# Altium PCB PCB1_IGNIS_v2_2.PcbDoc
Units mil, origin at the board's own origin, x right, y up, seen from the top; angles counter-clockwise.
Board outline 3740.16 x 1574.8 mil, 4 copper layers (Top Layer, GND Pour, Power Pour, Bottom Layer), stack 17.367 mil thick; 95 components, 62 nets, 365 pads, 110 vias.
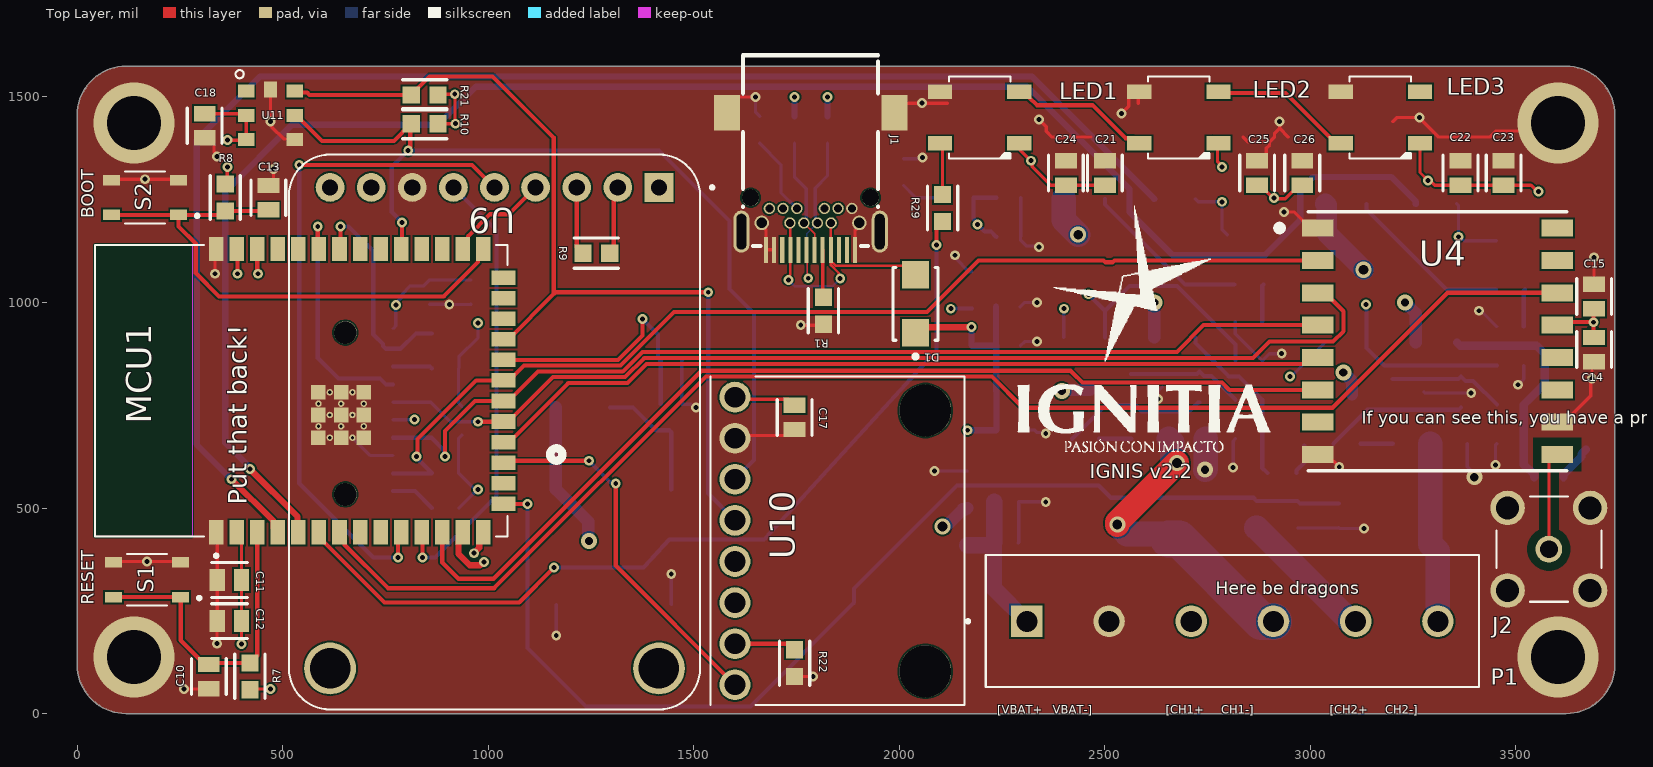
[diagram p0: Top Layer view]
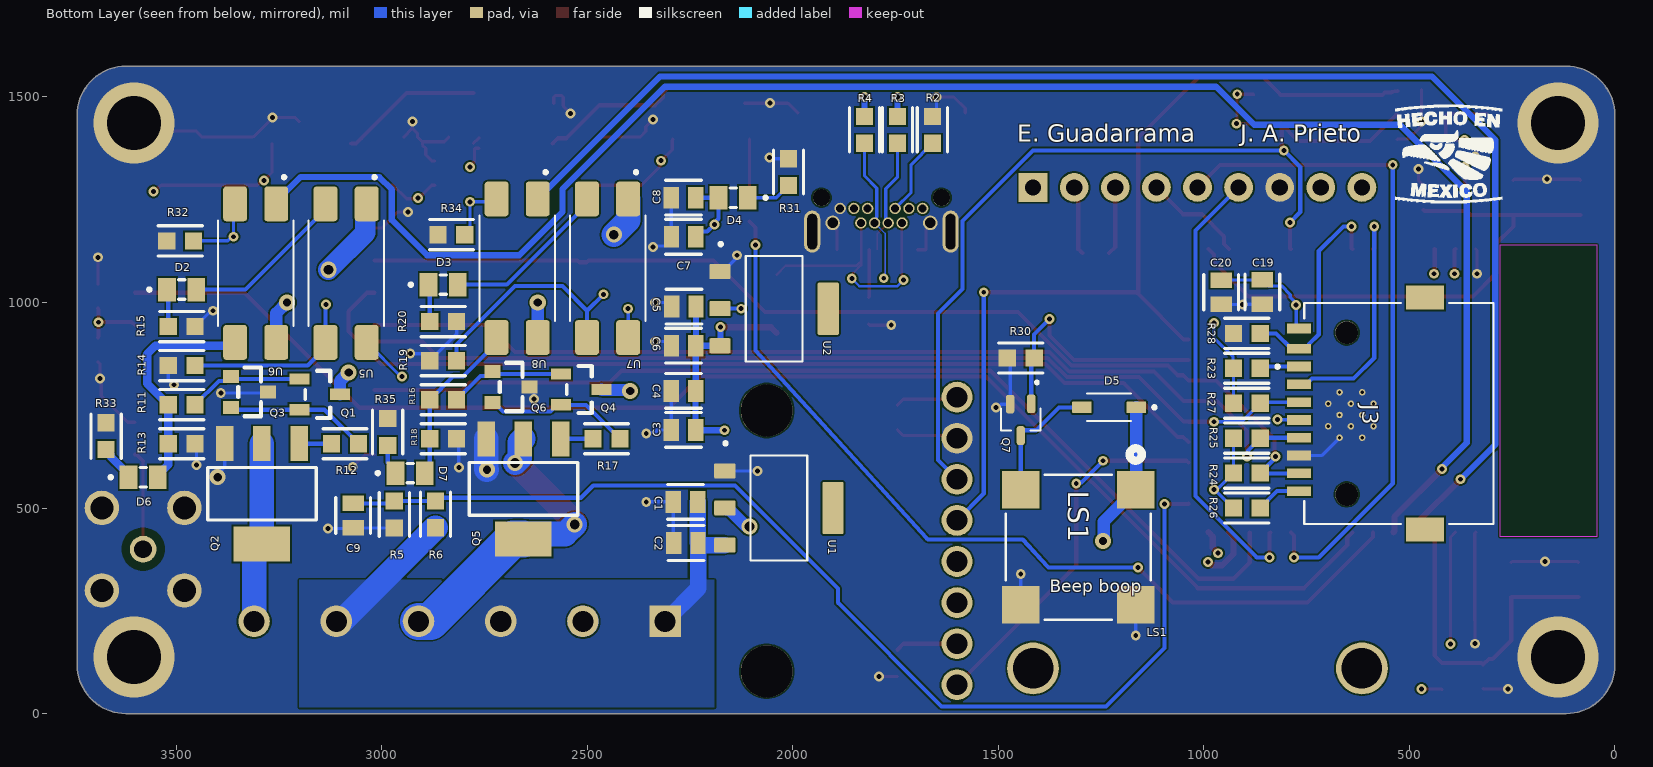
[diagram p1: Bottom Layer view, seen from below]
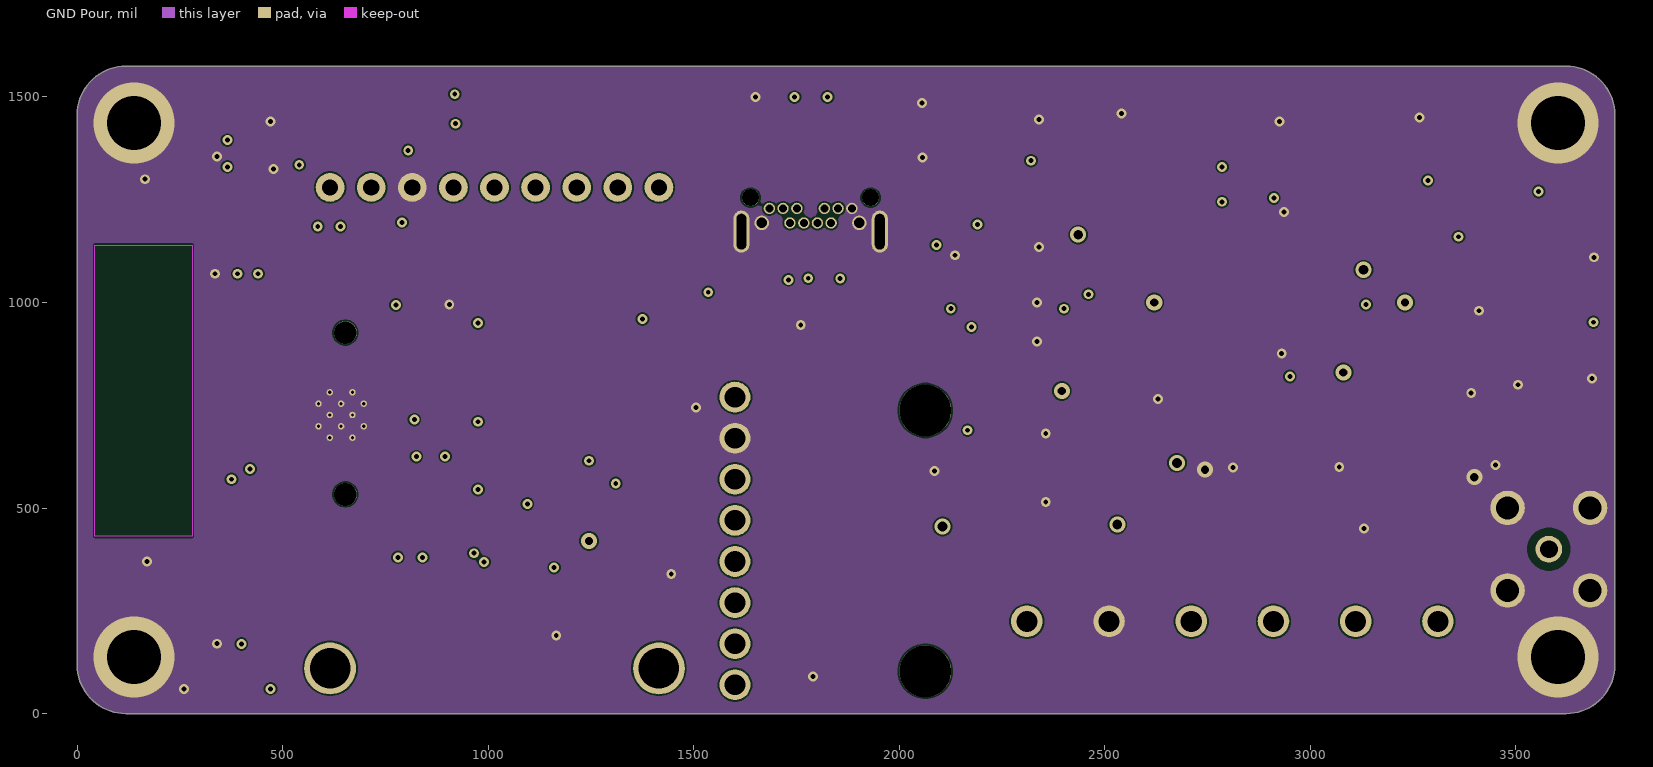
[diagram p2: GND Pour]
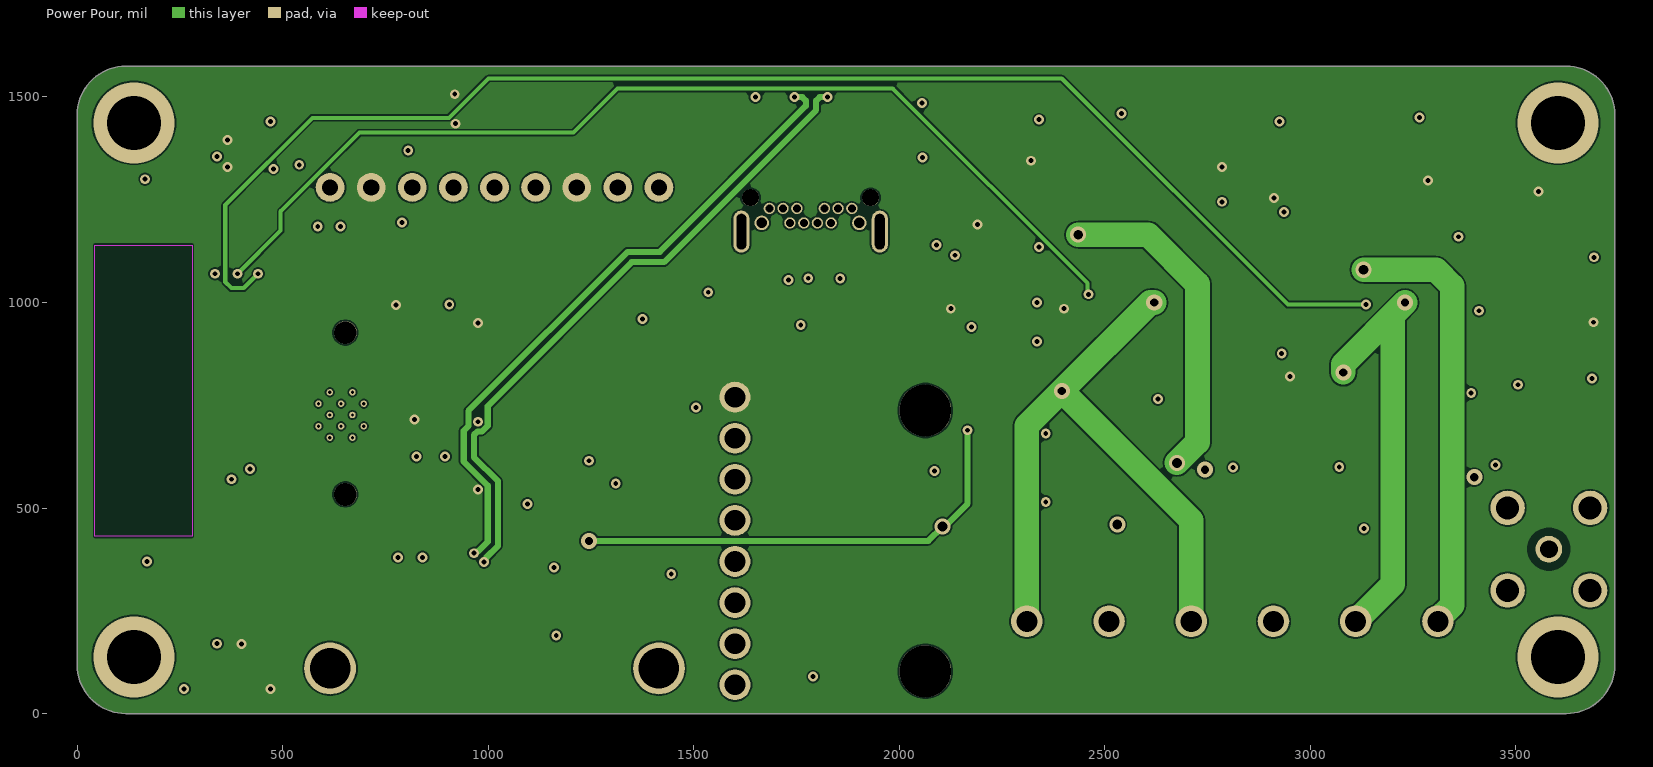
[diagram p3: Power Pour]

## Layer stack, top to bottom
Top Solder: solder mask 0.4, Solder Resist, Dk 3.5
Top Layer: signal copper 1.4
Dielectric 2: prepreg 3.937, PP-006, Dk 4.05
GND Pour: signal copper 1.378
Dielectric 1: dielectric 3.937, FR-4, Dk 4.8
Power Pour: signal copper 1.378
Dielectric 3: prepreg 3.937, PP-006, Dk 4.05
Bottom Layer: signal copper 1.4
Bottom Solder: solder mask 0.4, Solder Resist, Dk 3.5

## Board outline
0,118 0,1456.8 cw(c118,1456.8) 118,1574.8 3622.16,1574.8 cw(c3622.16,1456.8) 3740.16,1456.8 3740.16,118 cw(c3622.16,118) 3622.16,0 118,0 cw(c118,118)

## Design rules (kind name [scope] priority, off if disabled: settings)
Clearance RF_Clearance [InNet('NetJ2_1')] p1: gap=20 ignorepadtopadclearanceinfootprint=FALSE
Clearance USBC_3 [InComponent('J1') vs InComponent('J1')] p2: gap=3.94 ignorepadtopadclearanceinfootprint=FALSE
Clearance MCU_2 [InComponent('MCU1') vs InComponent('MCU1')] p3: gap=1.97 ignorepadtopadclearanceinfootprint=FALSE
Clearance [All] p4: gap=4 ignorepadtopadclearanceinfootprint=FALSE
ComponentClearance GPS [InComponent('U9') vs InComponent('MCU1') Or InComponent('R9')] p1: gap=0 collisioncheckmode=3 verticalgap=100000 showdistances=FALSE donotcheckwithout3dbody=TRUE
ComponentClearance IMU [InComponent('U10') vs InComponent('U9')] p2: gap=0 collisioncheckmode=3 verticalgap=100000 showdistances=FALSE donotcheckwithout3dbody=TRUE
ComponentClearance Buzzer [InComponent('LS1') vs InComponent('R30') Or InComponent('R31') Or InComponent('Q7')  Or InComponent('P1')] p3: gap=0 collisioncheckmode=3 verticalgap=100000 showdistances=FALSE donotcheckwithout3dbody=TRUE
ComponentClearance SD [InComponent('J3') Or InComponent('C19') Or InComponent('C20') Or InComponent('R23') Or InComponent('R24') Or InComponent('R25') Or InComponent('R26') Or InComponent('R27') Or InComponent('R28') vs InComponent('U9') Or InComponent('MCU1')] p4: gap=0 collisioncheckmode=3 verticalgap=100000 showdistances=FALSE donotcheckwithout3dbody=TRUE
ComponentClearance [All] p5: gap=10 collisioncheckmode=3 verticalgap=10 showdistances=FALSE
DiffPairsRouting [All] p1: maxlimit=10 minlimit=10 mostfreqgap=10 toplayer_minwidth=15 toplayer_maxwidth=15 toplayer_prefwidth=15 midlayer1_minwidth=15 midlayer1_maxwidth=15 midlayer1_prefwidth=15 midlayer2_minwidth=15 midlayer2_maxwidth=15 midlayer2_prefwidth=15 bottomlayer_minwidth=15 bottomlayer_maxwidth=15 bottomlayer_prefwidth=15 maxuncoupledlength=500
HoleSize IMU_Hole [All] p1: absolutevalues=TRUE maxlimit=157.48 minlimit=1 maxpercent=80.000 minpercent=20.000
HoleSize "Mounting Holes" [IsVia] p2: absolutevalues=TRUE maxlimit=137.8 minlimit=1 maxpercent=80.000 minpercent=20.000
HoleSize [All] p3: absolutevalues=TRUE maxlimit=100 minlimit=1 maxpercent=80.000 minpercent=20.000
MinimumSolderMaskSliver USBC_1 [InComponent('J1') vs InComponent('J1')] p1: minsoldermaskwidth=1.18
MinimumSolderMaskSliver [All] p2: minsoldermaskwidth=10
NetAntennae [NOT (IsVia And InNet('GND'))] p1: netantennaetolerance=0
PolygonConnect VCC3V3_DirectConnect [InNet('VCC_3V3')] p1: connectstyle=Direct reliefconductorwidth=10 reliefentries=4 polygonreliefangle="90 Angle" airgapwidth=10
PolygonConnect GND_DirectConnect [InNet('GND')] p2: connectstyle=Direct reliefconductorwidth=10 reliefentries=4 polygonreliefangle="90 Angle" airgapwidth=10
PolygonConnect MCU1_ThermalPad_DirectConnect [InNet('GND') And InComponent('MCU1')] p3: connectstyle=Direct reliefconductorwidth=10 reliefentries=4 polygonreliefangle="90 Angle" airgapwidth=10
PolygonConnect VBAT_DirectConnect [InNet('VBAT')] p4: connectstyle=Direct reliefconductorwidth=10 reliefentries=4 polygonreliefangle="90 Angle" airgapwidth=10
PolygonConnect [All] p5: connectstyle=Relief reliefconductorwidth=10 reliefentries=4 polygonreliefangle="90 Angle" airgapwidth=10
RoutingVias [All] p1: holewidth=28 width=50 viastyle="Through Hole" minholewidth=12 minwidth=24 maxholewidth=12 maxwidth=24
SilkToSolderMaskClearance MCU_GPS [InComponent('MCU1') vs InComponent('U9')] p1: minsilkscreentomaskgap=1.97 clearancetoexposedcopper=TRUE
SilkToSolderMaskClearance Diodes [InComponent('D1') Or InComponent('D2') Or InComponent('D3') Or InComponent('D4') Or InComponent('D5') Or InComponent('D6') Or InComponent('D7')] p2: minsilkscreentomaskgap=1.97 clearancetoexposedcopper=TRUE
SilkToSolderMaskClearance USBC_2 [InComponent('J1') vs InComponent('J1')] p3: minsilkscreentomaskgap=1.18 clearancetoexposedcopper=TRUE
SilkToSolderMaskClearance [IsPad] p4: minsilkscreentomaskgap=3.94 clearancetoexposedcopper=TRUE
SolderMaskExpansion [All] p1: expansion=0 istentingtop=FALSE
SupplyNets "Schematic Supply Nets_3" [InNet('VCC_3V3')] p1: voltage=0.000
SupplyNets "Schematic Supply Nets_2" [InNet('GND')] p2: voltage=0.000
SupplyNets "Schematic Supply Nets_1" [InNet('VBAT')] p3: voltage=0.000
SupplyNets "Schematic Supply Nets" [InNet('VCC_5V')] p4: voltage=0.000
Width [All] p1: maxlimit=98 minlimit=4 preferedwidth=10 midlayer1_minwidth=10 midlayer2_minwidth=10 minimp=50.000000 maximp=50.000000 favimp=50.000000
24 further rules are at their usual default settings.

## Classes and differential pairs
component class U_Storage: C19 C20 J3 R23 R24 R25 R26 R27 R28
component class U_Sensors: C17 C18 R10 R21 R22 U10 U11
component class U_RF_LoRa_&_GPS: C14 C15 J2 R9 U4 U9
component class U_Pyros: D2 D3 D6 D7 P1 Q1 Q2 Q3 Q4 Q5 Q6 R11 R12 R13 R14 R15 R16 R17 R18 R19 R20 R32 R33 R34 R35 U5 U6 U7 U8
component class U_Power: C1 C2 C3 C4 C5 C6 C7 C8 C9 D1 D4 J1 R1 R2 R3 R4 R5 R6 R31 U1 U2
component class U_Indicators: C21 C22 C23 C24 C25 C26 D5 LED1 LED2 LED3 LS1 Q7 R29 R30
component class Main: C10 C11 C12 C13 MCU1 R7 R8 S1 S2
differential pair USB2: +USB2_P -USB2_N

## Components (designator, comment, footprint, x,y, rotation, side; value= is the part's Value field where it differs from the comment)
C1 "10uF" FP-C0805C-DN-MFG 2260.47,515 r0 bottom value="0.10 μF"
C2 "100nF" FP-C0805C-DN-MFG 2259.53,415 r0 bottom value="0.10 μF"
C3 "10uF" FP-C0805C-DN-MFG 2265.47,690 r0 bottom value="0.10 μF"
C4 "100nF" FP-C0805C-DN-MFG 2265.47,785 r0 bottom value="0.10 μF"
C5 "10uF" FP-C0805C-DN-MFG 2264.53,990 r0 bottom value="0.10 μF"
C6 "100nF" FP-C0805C-DN-MFG 2265,895 r0 bottom value="0.10 μF"
C7 "10uF" FP-C0805C-DN-MFG 2265,1160 r0 bottom value="0.10 μF"
C8 "100nF" FP-C0805C-DN-MFG 2265.47,1255 r0 bottom value="0.10 μF"
C9 "100nF" FP-C0805C-DN-MFG 3068.85,482 r270 bottom value="0.10 μF"
C10 "1uF" FP-C0805C-DN-MFG 320,90 r270 top value="0.10 μF"
C11 "100nF" FP-C0805C-DN-MFG 370,325 r180 top value="0.10 μF"
C12 "22uF" FP-C0805C-DN-MFG 370,225 r180 top value="0.10 μF"
C13 "100nF" FP-C0805C-DN-MFG 465,1255 r90 top value="0.10 μF"
C14 "100nF" FP-C0805C-DN-MFG 3690,885.47 r270 top value="0.10 μF"
C15 "10uF" FP-C0805C-DN-MFG 3690,1014.53 r90 top value="0.10 μF"
C17 "100nF" FP-C0805C-DN-MFG 1745,720.47 r270 top value="0.10 μF"
C18 "100nF" FP-C0805C-DN-MFG 310,1430 r270 top value="0.10 μF"
C19 "22uF" FP-C0805C-DN-MFG 857.35,1025.47 r270 bottom value="0.10 μF"
C20 "100nF" FP-C0805C-DN-MFG 957.35,1025 r270 bottom value="0.10 μF"
C21 "100nF" FP-C0805C-DN-MFG 2500,1315 r90 top value="0.10 μF"
C22 "100nF" FP-C0805C-DN-MFG 3365,1315 r90 top value="0.10 μF"
C23 "100nF" FP-C0805C-DN-MFG 3470,1315 r90 top value="0.10 μF"
C24 "10uF" FP-C0805C-DN-MFG 2405,1315 r90 top value="0.10 μF"
C25 "10uF" FP-C0805C-DN-MFG 2870,1315 r90 top value="0.10 μF"
C26 "10uF" FP-C0805C-DN-MFG 2980,1315 r90 top value="0.10 μF"
D1 "SS24SHE3_B/H" FP-95400-MFG 2039.18,996.73 r90 top
D2 "SML-LXT0805IW-TR" LEDC2012X120N 3486.15,1031.5 r180 bottom
D3 "SML-LXT0805IW-TR" LEDC2012X120N 2850,1043.5 r180 bottom
D4 "SML-LXT0805IW-TR" LEDC2012X120N 2144.57,1255 r0 bottom
D5 "1N4148W-7" SOD3715X135N 1230,745 r0 bottom
D6 "SML-LXT0805IW-TR" LEDC2012X120N 3580,575 r180 bottom
D7 "SML-LXT0805IW-TR" LEDC2012X120N 2930.43,585 r180 bottom
J1 "2345986-1" TE_2345986-1 1779.18,1411.73 r180 top
J2 "BWSMA-KE-Z001" BAT_WIRELESS_BWSMA-KE-Z001 3580,400 r90 top
J3 "MSD-11-A" CUI_MSD-11-A 525,730 r90 bottom
LED1 "WS2812B" *LED3535 2195,1450 r180 top
LED2 "WS2812B" *LED3535 2680,1450 r180 top
LED3 "WS2812B" *LED3535 3170,1450 r180 top
LS1 "MLT-8530" MLT-8530_JHE 1305,405 r270 bottom
MCU1 "ESP32-S3-WROOM-1-N16R8" XCVR_ESP32-S3-WROOM-1-N16R2 545,785.47 r90 top
P1 "1729160" PHOENIX_1729160 2210,65 r0 top
Q1 "S8050_NPN" PCBComponent_1#1 3156.54,773.98 r0 bottom
Q2 "NCE6005AR_Mosfet_N" PCBComponent_1#2 3295,530 r90 bottom
Q3 "SS8550_PNP" PCBComponent_1#3 3311.15,781.5 r0 bottom
Q4 "S8050_NPN" PCBComponent_1#1 2520.39,785.98 r0 bottom
Q5 "NCE6005AR_Mosfet_N" PCBComponent_1#2 2658.85,542 r90 bottom
Q6 "SS8550_PNP" PCBComponent_1#3 2675,793.5 r0 bottom
Q7 "NTS4001NT1G" SOT65P220X100-3N 1445,715 r270 bottom
R1 "5.1k" FP-MCT0603-IPC_A 1815,980 r270 top
R2 "5.1k" FP-MCT0603-IPC_A 1660,1420 r90 bottom
R3 "22" FP-MCT0603-IPC_A 1745,1420 r270 bottom
R4 "22" FP-MCT0603-IPC_A 1825,1420 r270 bottom
R5 "47k" FP-MCT0603-IPC_A 2968.85,484.35 r270 bottom
R6 "100k" FP-MCT0603-IPC_A 2868.85,484.66 r270 bottom
R7 "10k" FP-MCT0603-IPC_A 420,90.47 r90 top
R8 "10k" FP-MCT0603-IPC_A 360,1255.47 r270 top
R9 "4k7" FP-MCT0603-IPC_A 1262.65,1120 r0 top
R10 "4k7" FP-MCT0603-IPC_A 845,1435 r180 top
R11 "1k" FP-MCT0603-IPC_A 3486.15,751.5 r180 bottom
R12 "100" FP-MCT0603-IPC_A 3088.8,656.5 r0 bottom
R13 "1k" FP-MCT0603-IPC_A 3486.15,656.5 r0 bottom
R14 "1k" FP-MCT0603-IPC_A 3486.15,846.5 r0 bottom
R15 "600" FP-MCT0603-IPC_A 3486.15,941.5 r180 bottom
R16 "1k" FP-MCT0603-IPC_A 2850,763.5 r180 bottom
R17 "100" FP-MCT0603-IPC_A 2452.65,668.5 r0 bottom
R18 "1k" FP-MCT0603-IPC_A 2850,668.5 r0 bottom
R19 "1k" FP-MCT0603-IPC_A 2850,858.5 r0 bottom
R20 "600" FP-MCT0603-IPC_A 2850,953.5 r180 bottom
R21 "4k7" FP-MCT0603-IPC_A 845,1505 r180 top
R22 "4k7" FP-MCT0603-IPC_A 1745,122.65 r90 top
R23 "10k" FP-MCT0603-IPC_A 895,840 r180 bottom
R24 "10k" FP-MCT0603-IPC_A 895,585 r180 bottom
R25 "10k" FP-MCT0603-IPC_A 895,670 r180 bottom
R26 "10k" FP-MCT0603-IPC_A 895,500 r180 bottom
R27 "10k" FP-MCT0603-IPC_A 895,755 r180 bottom
R28 "10k" FP-MCT0603-IPC_A 895,925 r180 bottom
R29 "33" FP-MCT0603-IPC_A 2105,1230 r90 top
R30 "10k" FP-MCT0603-IPC_A 1445,865 r0 bottom
R31 "1k" FP-MCT0603-IPC_A 2010,1317.35 r90 bottom
R32 "100" FP-MCT0603-IPC_A 3490,1150 r0 bottom
R33 "1k" FP-MCT0603-IPC_A 3670,675 r90 bottom
R34 "100" FP-MCT0603-IPC_A 2830,1165 r0 bottom
R35 "1k" FP-MCT0603-IPC_A 2985,685 r90 bottom
S1 "Reset" SW_SKRPABE010 170,325.47 r180 top
S2 "Boot" SW_SKRPABE010 165,1255.47 r180 top
U1 "AMS1117-5V" SOT229P700X180-4N 2033.31,500.16 r270 bottom
U2 "AMS1117-3V3" SOT229P700X180-4N 2045,985 r270 bottom
U4 "RFM95W-868S2" XCVR_RFM95W-868S2 3308.66,905.63 r0 top
U5 "PC817X2NIP1B" SOIC254P960X420-4N 3086.15,1071.5 r270 bottom
U6 "PC817X2NIP1B" SOIC254P960X420-4N 3306.15,1071.5 r270 bottom
U7 "PC817X2NIP1B" SOIC254P960X420-4N 2450,1083.5 r270 bottom
U8 "PC817X2NIP1B" SOIC254P960X420-4N 2670,1083.5 r270 bottom
U9 "746" XCVR_746 1015,685 r180 top
U10 "GY-521" MODULE_GY-521 1849.21,420 r0 top
U11 "BMP180" LGA7-1.5-3.8X3.6MM 470,1455.47 r90 top

## Footprints (in the part's own frame and the unit in brackets; to place one, negate y for a bottom-side part, rotate by r counter-clockwise, add the part's x,y. Pads: shape width x height; smd on the part's side, far side on the other; paste and mask are expansions set on the pad)
*LED3535 [mm]
  rect 1.5x0.9 smd: 1(-2.45,1.6) 2(-2.45,-1.6) 3(2.45,-1.6) 4(2.45,1.6)
  silkscreen extent -1.91,-2.53 1.9,2.54, body extent -2.7,-2.5 2.7,2.5, height 1.49
BAT_WIRELESS_BWSMA-KE-Z001 [mm]
  round 1.65 hole 1.1: 1(0,0)
  round 2.13 hole 1.42: 2_1(-2.55,2.55) 2_2(2.55,2.55) 2_3(2.55,-2.55) 2_4(-2.55,-2.55)
  silkscreen extent -3.25,-3.25 3.25,3.25, body extent -3.23,-11.73 3.23,3.23, height 9.75
CUI_MSD-11-A [mm]
  rect 0.6x1.5 smd: CD(5.25,6.18) P1(2.9,6.18) P2(1.8,6.18) P3(0.7,6.18) P4(-0.4,6.18) P5(-1.5,6.18) P6(-2.6,6.18) P7(-3.7,6.18) P8(-4.8,6.18) WP(4,6.18)
  rect 1.5x2.34 smd: G1(-7.17,-1.62) G2(7.17,-1.62)
  round 1.4 hole 1.4 unplated: ""(-5,3.23) ""(5,3.23)
  silkscreen extent -6.84,-5.85 6.84,7.6, body extent -7.39,-5.87 7.39,6.73, height 1.82
FP-95400-MFG [mm]
  rect 1.7x1.68 smd paste+0 mask+0: 1(-1.79,0) 2(1.79,0)
  silkscreen extent -3.37,-1.4 2.25,1.4, body extent -2.74,-1.5 2.74,1.5, height 0.25
FP-C0805C-DN-MFG [mm]
  rect 0.95x1.35 smd paste+0 mask+0: 1(-0.75,0) 2(0.75,0)
  silkscreen extent -1.1,-1.07 1.1,1.07, body extent -1,-0.63 1,0.63, height 0.88
FP-MCT0603-IPC_A [mil]
  rect 41.88x41.82 smd paste+0 mask+0: 1(-32.65,0) 2(32.65,0)
  silkscreen extent -54,-37 54,37, body extent -31,-17 31,17, height 22
LEDC2012X120N [mm]
  rect 1.1x1.45 smd: A(0.9,0) C(-0.9,0)
  silkscreen extent -2.1,-0.6 0.2,0.6, body extent -1,-0.65 1,0.65, height 0.9
LGA7-1.5-3.8X3.6MM [mm]
  rect 0.8x1 smd: 1(1.5,1.5) 2(0,1.5) 3(-1.5,1.5) 4(-1.5,-1.5) 5(0,-1.5) 6(1.5,-1.5)
  rect 1x0.8 smd: 7(1.6,0)
  silkscreen extent 2.29,1.65 2.79,2.16, body extent -1.9,-1.8 1.9,1.8, height 1
MLT-8530_JHE [mil]
  rect 91x91 smd paste+0 mask+0: 1(-139.76,139.76) 2(-139.76,-139.76) 3(139.76,139.76) 4(139.76,-139.76)
  silkscreen extent -240,-177 177,177
MODULE_GY-521 [mm]
  round 1.905 hole 1.27 mask+0.102: AD0(-6.33,-6.35) GND(-6.33,6.35) INT(-6.33,-8.89) SCL(-6.33,3.81) SDA(-6.33,1.27) VCC(-6.33,8.89) XCL(-6.33,-3.81) XDA(-6.33,-1.27)
  round 3.2 hole 3.2 unplated mask+0: ""(5.43,-8.06) ""(5.43,8.06)
  silkscreen extent -7.85,-10.15 7.85,10.15, body extent -7.85,-10.15 7.85,10.15, height 11.6
PCBComponent_1#1 [mm]
  rect 1.25x0.7 smd paste+0 mask+0.102: 1(1.092,-1.014) 2(1.092,0.886) 3(-1.407,-0.064)
  silkscreen extent -0.81,-1.52 0.74,1.4
PCBComponent_1#2 [mm]
  rect 2.159x1.092 smd paste+0 mask+0.102: 1(3.213,-2.409) 2(3.213,-0.098) 3(3.213,2.188)
  rect 2.159x3.505 smd paste+0 mask+0.102: 4(-2.984,-0.098)
  silkscreen extent -1.51,-3.46 1.74,3.24
PCBComponent_1#3 [mm]
  rect 1x0.8 smd paste+0 mask+0.051: 1(1.403,-0.974) 2(1.403,0.926) 3(-0.897,-0.024)
  silkscreen extent -0.45,-1.52 0.95,1.48
PHOENIX_1729160 [mm]
  rect 1.95x1.95 / inner round 1.95 / far side rect 1.95x1.95 hole 1.3: 1(2.54,4.05)
  round 1.95 hole 1.3: 2(7.62,4.05) 3(12.7,4.05) 4(17.78,4.05) 5(22.86,4.05) 6(27.94,4.05)
  silkscreen extent -1.2,0 30.48,8.15, body extent -0.54,-0.02 30.51,8.13, height 9.97
SOD3715X135N [mm]
  rrect18% 1.21x0.73 smd paste+0 mask+0.102: A(1.68,0) C(-1.68,0)
  silkscreen extent -2.9,-0.85 1.35,0.85, body extent -1.91,-0.8 1.9,0.8, height 1.1
SOIC254P960X420-4N [mm]
  rrect25% 2.15x1.48 smd: 1(-4.28,1.27) 2(-4.28,-1.27) 3(4.28,-1.27) 4(4.28,1.27)
  silkscreen extent -6.03,-2.33 3.25,2.33, body extent -4.87,-2.29 4.87,2.29, height 4
SOT65P220X100-3N [mm]
  rrect50% 1.15x0.5 smd: 1(-0.98,0.65) 2(-0.96,-0.65) 3(0.98,0)
  silkscreen extent -2.4,-1.21 0.68,1.21
SOT229P700X180-4N [mm]
  rrect15% 0.93x1.31 smd: 1(-2.29,-3.345) 2(0,-3.345) 3(2.29,-3.345)
  rrect15% 3.24x1.31 smd: 4(0,3.345)
  silkscreen extent -4.09,-3.4 3.25,1.75, body extent -3.25,-3.5 3.25,3.5, height 1.8
SW_SKRPABE010 [mm]
  rect 1.05x0.65 smd: 1(-2.075,1.075) 2(2.075,1.075) 3(-2.075,-1.075) 4(2.075,-1.075)
  silkscreen extent -3.32,-1.6 1.23,1.6, body extent -2.3,-1.6 2.3,1.6, height 2.5
TE_2345986-1 [mm]
  rect 0.25x1.6 smd paste-100 mask+0.051: A1(-2.87,7.201) A2(-2.37,7.201) A3(-1.87,7.201) A4(-1.37,7.201) A5(-0.87,7.201) A6(-0.37,7.201) A7(0.13,7.201) A8(0.63,7.201) A9(1.129,7.201) A10(1.629,7.201) A11(2.129,7.201) A12(2.629,7.201)
  round 0.9 hole 0.65 paste-2539.97 mask+0.051: B1(2.899,5.541) B12(-3.131,5.541)
  round 0.7 hole 0.5 paste-2539.97 mask+0.051: B2(2.429,4.641) B3(1.579,4.641) B4(1.159,5.541) B5(0.729,4.641) B6(0.299,5.541) B7(-0.541,5.541) B8(-0.971,4.641) B9(-1.391,5.541) B10(-1.821,4.641) B11(-2.671,4.641)
  oval 1x2.6 hole 0.6 slot 2.2 at 90 deg paste-2539.97 mask+0.051: SH1(4.154,6.081) SH2(-4.396,6.081)
  rect 1.6x2.2 smd paste-100 mask+0.051: SH3(5.054,-1.269) SH4(-5.296,-1.269)
  round 1.05 hole 1.05 unplated paste-2539.97: ""(-3.831,3.981) ""(3.589,3.981)
  silkscreen extent -4.29,-4.82 4.05,6.97, body extent -4.75,-5.04 4.49,7.75, height 3.34
XCVR_746 [mil]
  rect 70x70 / inner round 70 / far side rect 70x70 hole 39.37 mask+4.02: 1(-400,-595)
  round 70 hole 39.37 mask+4.02: 2(-300,-595) 3(-200,-595) 4(-100,-595) 5(0,-595) 6(100,-595) 7(200,-595) 8(300,-595) 9(400,-595)
  round 125.98 hole 98.43 mask+4.02: SH1(-400,575) SH2(400,575)
  silkscreen extent -533,-675 500,675, body extent -500,-670 500,670, height 591
XCVR_ESP32-S3-WROOM-1-N16R2 [mm]
  rect 1.5x0.9 smd: 2(-8.75,3.99) 3(-8.75,2.72) 4(-8.75,1.45) 5(-8.75,0.18) 6(-8.75,-1.09) 7(-8.75,-2.36) 8(-8.75,-3.63) 9(-8.75,-4.9) 10(-8.75,-6.17) 11(-8.75,-7.44) 12(-8.75,-8.71) 13(-8.75,-9.98) 14(-8.75,-11.25) 27(8.75,-11.25) 28(8.75,-9.98) 29(8.75,-8.71) 30(8.75,-7.44) 31(8.75,-6.17) 32(8.75,-4.9) 33(8.75,-3.63) 34(8.75,-2.36) 35(8.75,-1.09) 36(8.75,0.18) 37(8.75,1.45) 38(8.75,2.72) 39(8.75,3.99) GND(-8.75,5.26) GND(8.75,5.26)
  rect 0.9x1.5 smd: 15(-6.985,-12.5) 16(-5.715,-12.5) 17(-4.445,-12.5) 18(-3.175,-12.5) 19(-1.905,-12.5) 20(-0.635,-12.5) 21(0.635,-12.5) 22(1.905,-12.5) 23(3.175,-12.5) 24(4.445,-12.5) 25(5.715,-12.5) 26(6.985,-12.5)
  round 0.4 hole 0.2 mask+0: 41_10(-1.5,-1.76) 41_11(-2.9,-1.76) 41_12(-0.1,-1.76) 41_13(-2.9,-3.16) 41_14(-1.5,-3.16) 41_15(-0.1,-3.16) 41_16(-2.2,-1.06) 41_17(-0.8,-1.06) 41_18(-2.2,-2.46) 41_19(-0.8,-2.46) 41_20(-2.2,-3.86) 41_21(-0.8,-3.86)
  rect 0.9x0.9 smd: GND(-2.9,-2.46) GND(-2.9,-1.06) GND(-2.9,-3.86) GND(-1.5,-1.06) GND(-1.5,-3.86) GND(-1.5,-2.46) GND(-0.1,-1.06) GND(-0.1,-2.46) GND(-0.1,-3.86)
  Keep-Out Layer region: 9,6.75 -9,6.75 -9,12.75 9,12.75
  Keep-Out Layer region: 9,6.75 -9,6.75 -9,12.75 9,12.75
  silkscreen extent -10.3,-12.75 9,12.75, body extent -9,-12.75 9,12.75, height 3.25
XCVR_RFM95W-868S2 [mm]
  rect 1.95x1.05 smd: 1(-7.4,7) 2(-7.4,5) 3(-7.4,3) 4(-7.4,1) 5(-7.4,-1) 6(-7.4,-3) 7(-7.4,-5) 8(-7.4,-7) 9(7.4,-7) 10(7.4,-5) 11(7.4,-3) 12(7.4,-1) 13(7.4,1) 14(7.4,3) 15(7.4,5) 16(7.4,7)
  silkscreen extent -10.04,-8 8,8, body extent -8,-8 8,8, height 1.8

## Part data
C1 C2 C3 C4 C5 C6 C7 C8 C9 C10 C11 C12 C13 C14 C15 C17 C18 C19 C20 C21 C22 C23 C24 C25 C26: library part CMP-2007-00279-2, "CAP CER 0.1UF 50V X7R 0805", Capacitance="0.10 μF", Manufacturer=KEMET, Manufacturer Part Number=C0805C104K5RACTU, Package=C0805C-DN, Temperature="-55°C to +125°C", Temperature Characteristic=X7R, Temperature Coefficient=30ppm/°C, Temperature Range High=+125°C, Temperature Range Low=-55°C, Tolerance=0.1, Voltage Rating="50 V", Automotive=No, Category=Cap, ComponentLink2Description=Datasheet, ComponentLink2URL=https://content.kemet.com/datasheets/KEM_C1003_C0G_SMD.pdf, Device Class L1="Passive Components", Device Class L2=Capacitors, Device Class L3="Ceramic Capacitors", Digikey Description="CAP CER 0.1UF 50V X7R 0805", Height=0.88mm, Ipc Land Pattern Name=CAPC200125X78, Lead Free=Yes, Material=Ceramic, Mouser Description="Cap Ceramic 0.1uF 50V X7R 10% SMD 2.0 x 1.2 mm 125 C Paper T/R", Octopart=https://octopart.com/c0805c104k5ractu-kemet-143926, RoHS=TRUE
D1: library part CMP-02539-000047-1, "DIODE SCHOTTKY 2A 40V DO-214AC", RoHS Compliant=Yes
D2 D3 D4 D6 D7: "LED;Red;11mcd;0.061In.Dia.;SMD;100mA;2V Vf;635nm;140deg;SMD;White Diffused;5V Vr", Package="0805 Lumex", Check_prices=https://www.snapeda.com/parts/SML-LXT0805IW-TR/Lumex+Opto%252FComponents+Inc./view-part/?ref=eda, MF="Lumex Opto/Components", MP=SML-LXT0805IW-TR, SnapEDA_Link=https://www.snapeda.com/parts/SML-LXT0805IW-TR/Lumex+Opto%252FComponents+Inc./view-part/?ref=snap
D5: "Diode Standard 100 V 300mA (DC) Surface Mount SOD-123", Package="SOD-123 Fairchild Semiconductor", Check_prices=https://www.snapeda.com/parts/1N4148W-7/Diodes+Inc./view-part/?ref=eda, MF="Diodes Inc.", MP=1N4148W-7, SnapEDA_Link=https://www.snapeda.com/parts/1N4148W-7/Diodes+Inc./view-part/?ref=snap
J1: Package=None, Availability=Unavailable, MP=2345986-1, Price=None
J2: "1 Inner bore SMA Board Edge Positive foot -65â„ƒ~+165â„ƒ 50Î© Plugin RF Connectors / Coaxial Connectors ROHS", Package=None, Check_prices=https://www.snapeda.com/parts/BWSMA-KE-Z001/Bat+Wireless/view-part/?ref=eda, MF="Bat Wireless", MP=BWSMA-KE-Z001, SnapEDA_Link=https://www.snapeda.com/parts/BWSMA-KE-Z001/Bat+Wireless/view-part/?ref=snap
J3: "Micro SD Card Connector, 8 Positions, Connector and Ejector, Push In, Auto Eject Out, Surface Mount, 1.85 mm Heaight Above Board, Gold Flash", Package=None, Check_prices=https://www.snapeda.com/parts/MSD-11-A/Same+Sky/view-part/?ref=eda, MF="Same Sky", MP=MSD-11-A, SnapEDA_Link=https://www.snapeda.com/parts/MSD-11-A/Same+Sky/view-part/?ref=snap
LED1 LED2 LED3: "Intelligent control LED integrated light source", Package=None, Check_prices=https://www.snapeda.com/parts/WS2812B/Worldsemi/view-part/?ref=eda, MF=Worldsemi, MP=WS2812B, SnapEDA_Link=https://www.snapeda.com/parts/WS2812B/Worldsemi/view-part/?ref=snap
LS1: "Description", Manufacturer_Name="Jiangsu Huaneng Elec", Copyright="Copyright (C) 2025 Ultra Librarian. All rights reserved.", Manufacturer_Part_Number=MLT-8530, RefDes=RefDes, Type=Type
MCU1: library part ESP32-S3-WROOM-1-N16R2, "Bluetooth, WiFi 802.11b/g/n, Bluetooth v5.0 Transceiver Module 2.4GHz PCB Trace Surface Mount", Package="NON STANDARD Espressif Systems", Check_prices=https://www.snapeda.com/parts/ESP32S3WROOM1N16R2/Espressif+Systems/view-part/?ref=eda, MF="Espressif Systems", MP=ESP32S3WROOM1N16R2, SnapEDA_Link=https://www.snapeda.com/parts/ESP32S3WROOM1N16R2/Espressif+Systems/view-part/?ref=snap
P1: "PCB Terminal Screw 5.08mm 16AWG 400V 13.5A 6 Position COMBICON MKDSN Series", Package=None, Check_prices=https://www.snapeda.com/parts/1729160/Phoenix+Contact/view-part/?ref=eda, MF="Phoenix Contact", MP=1729160, SnapEDA_Link=https://www.snapeda.com/parts/1729160/Phoenix+Contact/view-part/?ref=snap
Q1 Q3 Q4 Q6: library part Component_1
Q2 Q5: library part NCE6005AR
Q7: "N-Channel 30V 270mA _Ta_ 330mW _Ta_ Surface Mount SC-70-3 _SOT323_", Package="SC-70 ON Semiconductor", Availability=Unavailable, MF="ON Semiconductor", MP=NTS4001NT1G, Price=None, SnapEDA_Link=https://www.snapeda.com/parts/NTS4001NT1G/ON%20Semiconductor/view-part/274588/?ref=snap
R1 R2 R3 R4 R5 R6 R7 R8 R9 R10 R11 R12 R14 R15 R16 R17 R18 R19 R20 R21 R22 R23 R24 R25 R26 R27 R28 R29 R30 R31: library part CMP-02407-011165-1, "RES SMD 100 OHM 1% 1/8W 0603", Case Code (Imperial)=0603, Case Code (Metric)=1608, Max Operating Temperature=155°C, Max Power Dissipation=125mW, Min Operating Temperature=-55°C, Package Quantity=1000, Resistance=20kR, Resistor Type="Thin Film", Temperature Coefficient=25ppm/°C, Tolerance=0.1%, Voltage Rating=75V, Case/Package=0603, Construction=Rectangular, Depth=0.85mm, Features="Automotive AEC-Q200", Height=0.022inch, Length=1.55mm, Military Standard=Not, Number of Terminations=2, Packaging="Tape and Reel", Power Rating=125mW, Series="MCT 0603 - Precision", Termination=SMD/SMT, Weight=6.7E-05oz, Width=0.033inch
R13 R33 R35: library part CMP-02407-011165-1, "RES SMD 100 OHM 1% 1/8W 0603", Case Code (Imperial)=0603, Case Code (Metric)=1608, Max Operating Temperature=155°C, Max Power Dissipation=125mW, Min Operating Temperature=-55°C, Package Quantity=1000, Resistance=1kR, Resistor Type="Thin Film", Temperature Coefficient=25ppm/°C, Tolerance=0.1%, Voltage Rating=75V, Case/Package=0603, Construction=Rectangular, Depth=0.85mm, Features="Automotive AEC-Q200", Height=0.022inch, Length=1.55mm, Military Standard=Not, Number of Terminations=2, Packaging="Tape and Reel", Power Rating=125mW, Series="MCT 0603 - Precision", Termination=SMD/SMT, Weight=6.7E-05oz, Width=0.033inch
R32 R34: library part CMP-02407-011165-1, "RES SMD 100 OHM 1% 1/8W 0603", Case Code (Imperial)=0603, Case Code (Metric)=1608, Max Operating Temperature=155°C, Max Power Dissipation=125mW, Min Operating Temperature=-55°C, Package Quantity=1000, Resistor Type="Thin Film", Temperature Coefficient=25ppm/°C, Tolerance=0.1%, Voltage Rating=75V, Case/Package=0603, Construction=Rectangular, Depth=0.85mm, Features="Automotive AEC-Q200", Height=0.022inch, Length=1.55mm, Military Standard=Not, Number of Terminations=2, Packaging="Tape and Reel", Power Rating=125mW, Resistance=100, Series="MCT 0603 - Precision", Termination=SMD/SMT, Weight=6.7E-05oz, Width=0.033inch
S1 S2: library part SKRPABE010, "Switch Tactile N.O. SPST Button J-Bend 0.05A 16VDC 1.57N SMD Automotive T/R", Package=None, Check_prices=https://www.snapeda.com/parts/SKRPABE010/ALPS/view-part/?ref=eda, MF=ALPS, MP=SKRPABE010, SnapEDA_Link=https://www.snapeda.com/parts/SKRPABE010/ALPS/view-part/?ref=snap
U1 U2: library part AMS1117-5.0, "1A LOW DROPOUT VOLTAGE REGULATOR", Package="SOT-223 Seeed Technology", Availability="Not in stock", Check_prices=https://www.snapeda.com/parts/AMS1117-5.0/ams/view-part/?ref=eda, MF=ams, MP=AMS1117-5.0, Price=None, SnapEDA_Link=https://www.snapeda.com/parts/AMS1117-5.0/ams/view-part/?ref=snap
U4: "General ISM < 1GHz LoRaâ„¢ Transceiver Module 868MHz Antenna Not Included Surface Mount", Package="Non Standard RF Solutions", Availability="In Stock", Check_prices=https://www.snapeda.com/parts/RFM95W-868S2/RF+Solutions/view-part/?ref=eda, MF=RF, MP=RFM95W-868S2, Price=None, Purchase-URL=https://pricing.snapeda.com/search?q=RFM95W-868S2&ref=eda, SnapEDA_Link=https://www.snapeda.com/parts/RFM95W-868S2/RF+Solutions/view-part/?ref=snap
U5 U6 U7 U8: "Optocoupler DC-IN 1-CH Transistor DC-OUT 4-Pin DIP SMD T/R", Package="SMD-4 Sharp Microelectronics", Check_prices=https://www.snapeda.com/parts/PC817X2NIP1B/Sharp+Microelectronics/view-part/?ref=eda, MF="Sharp Microelectronics", MP=PC817X2NIP1B, SnapEDA_Link=https://www.snapeda.com/parts/PC817X2NIP1B/Sharp+Microelectronics/view-part/?ref=snap
U9: "Ultimate GPS Breakout, 66 channel, 10 Hz updates, 5 V, -165 dBm, MTK3339 Chipset", Package="NON STANDARD-11 Adafruit", Check_prices=https://www.snapeda.com/parts/746/Adafruit+Industries/view-part/?ref=eda, MF="Adafruit Industries", MP=746, SnapEDA_Link=https://www.snapeda.com/parts/746/Adafruit+Industries/view-part/?ref=snap
U10: "Triple Axis Accelerometer Gyro Breakout", Package=Package, Check_prices=https://www.snapeda.com/parts/GY-521/GODREAM+FORDREAM+CO.%252C+LIMITED/view-part/?ref=eda, MF="GODREAM FORDREAM CO., LIMITED", MP=GY-521, SnapEDA_Link=https://www.snapeda.com/parts/GY-521/GODREAM+FORDREAM+CO.%252C+LIMITED/view-part/?ref=snap
U11: library part PRESSURE-BMP180(LGA7), "Pressure Sensor 4.35PSI ~ 15.95PSI (30kPa ~ 110kPa) Absolute - 16 ~ 19 b 7-VLGA", Package="LGA-7 Bosch", Check_prices=https://www.snapeda.com/parts/BMP180/Bosch/view-part/?ref=eda, MF=Bosch, MP=BMP180, SnapEDA_Link=https://www.snapeda.com/parts/BMP180/Bosch/view-part/?ref=snap

## Via types
v1: diameter 24, hole 12, Top Layer to Bottom Layer, tented both sides, 94 vias
v2: diameter 39, hole 20, Top Layer to Bottom Layer, tented both sides, 7 vias
v3: diameter 39, hole 24, Top Layer to Bottom Layer, tented both sides, 5 vias
v4: diameter 196.85, hole 131.89, Top Layer to Bottom Layer, 4 vias

## Nets (pads, with @x,y where several pads share a name; then routed paths per layer and width w, separated by ;. In a path a pad name is that pad's centre, name@x,y a point inside that pad or via, vN(x,y) a via of type N, cw(c..) or ccw(c..) an arc to the next point about the centre after c; other vN are vias at no path point)
BOOT: C13.1 MCU1.27 R8.2 S2.1 S2.2 | length 1327
  Top Layer w10: S2.2 S2.1 ; C13.1 462.35,1222.82 R8.2 350.33,1213.15 S2.1 ; MCU1.27 975.2,1117.24 975.2,1098.79 891.41,1015 345,1015 288.25,1071.75 288.25,1143.53 246.69,1185.09 S2.1
BUZZER: MCU1.22 Q7.1 R30.1 | length 627.3
  Top Layer w10: MCU1.22 1315.47,860.47 1375,920 v1(1375,960)
  Bottom Layer w10: v1(1375,960) 1412.35,922.65 R30.1 1419.41,857.94 Q7.1
DAT1: J3.P8 R26.2 | length 111
  Bottom Layer w10: J3.P8 821.29,541.02 R26.2
DAT2: J3.P1 R23.2 | length 95.8
  Bottom Layer w10: J3.P1 858.17,844.17 R23.2
DN: J1.A7 J1.B7 R4.2 | length 425.6
  Top Layer w4: J1.A7 1776.13,1126.18 1776.13,1061.05 v1(1778.18,1059)
  Bottom Layer w4: v1(1778.18,1059) 1775,1062.18 1775,1168.1 J1.B7
  Bottom Layer w8: J1.B7 1796.74,1197.32 1796.74,1206.57 1795.26,1208.05 1795.26,1278.05 1825,1307.79 R4.2
DP: J1.A6 J1.B6 R3.2 | length 284.4
  Top Layer w4: J1.B6 1793.75,1167.24 J1.A6
  Bottom Layer w8: R3.2 1745,1305 1773.52,1276.48 1773.52,1204.98 1767.41,1198.87 J1.B6
EMATCH_CH1_B: P1.4 Q5.2 Q5.4 U7.1 | length 1697.9
  Top Layer w60: v3(2530,460) 2530,465 v3(2675,610)
  Power Pour w60: v3(2435,1165) 2605,1165 2725,1045 2725,660 v3(2675,610)
  Bottom Layer w10: 2868.78,237.22 2897.22,237.22 P1.4
  Bottom Layer w60: U7.1 2400,1200 v3(2435,1165) ; v3(2530,460) 2553,437 2642.5,437 Q5.4 ; Q5.2 2663.5,660 2663.5,621.5 v3(2675,610)
  Bottom Layer w90: Q5.4 2680.5,424.5 2880.55,224.45 P1.4
EMATCH_CH2_N: P1.6 Q2.2 Q2.4 U5.1 | length 1701.7
  Power Pour w60: v3(3129.33,1079.69) 3305.31,1079.69 3345,1040 3345,263.99 3310,228.99 P1.6
  Bottom Layer w50: U5.1 3039.21,1236.94 3039.21,1169.81 v3(3129.33,1079.69)
  Bottom Layer w60: Q2.2 Q2.4 3292.5,412.5 3310,395 P1.6
FIX_GPS: MCU1.28 U9.4 | length 250
  Top Layer w10: MCU1.28 950.63,1142.68 950.63,1161.13 1004.32,1214.83 1049.83,1214.83 U9.4
GND: C1.2 C2.2 C3.2 C4.2 C5.2 C6.2 C7.2 C8.2 C9.2 C10.2 C11.2 C12.2 C13.2 C14.2 C15.2 C17.2 C18.2 C19.2 C20.2 C21.2 C22.2 C23.2 C24.2 C25.2 C26.2 J1.A1 J1.A11 J1.A12 J1.B1 J1.B11 J1.B12 J1.SH1 J1.SH2 J1.SH3 J1.SH4 J2.2_1 J2.2_2 J2.2_3 J2.2_4 J3.P6 LED1.3 LED2.3 LED3.3 LS1.3 LS1.4 MCU1.41_10 MCU1.41_11 MCU1.41_12 MCU1.41_13 MCU1.41_14 MCU1.41_15 MCU1.41_16 MCU1.41_17 MCU1.41_18 MCU1.41_19 MCU1.41_20 MCU1.41_21 MCU1.GND P1.2 Q2.3 Q3.3 Q5.3 Q6.3 Q7.2 R1.2 R2.2 R5.2 R13.1 R14.2 R15.2 R18.1 R19.2 R20.2 R22.1 R28.1 R30.2 R31.2 R32.2 R33.2 R34.2 R35.2 S1.3 S1.4 S2.3 S2.4 U1.1 U2.1 U4.1 U4.8 U4.10 U9.7 U10.GND U11.4 U11.7 | length 5188.4
  Top Layer w8: S2.4 85.51,1300 v1(165,1300) 244.49,1300 S2.3 ; S1.4 90.51,370 249.49,370 S1.3 ; v1(260,60) 319.53,60 C10.2 ; C18.2 317.87,1400.47 332.57,1385.77 332.57,1366.75 340,1359.33 v1(340,1355) ; v1(335,1070) 335,1127.05 MCU1.GND@337.91,1129.96 ; MCU1.GND@337.91,440.98 340.47,438.43 C11.2 C12.2 340,224.53 v1(340,170) ; C13.2 477.5,1297.03 v1(477.5,1325) ; U11.7 v1(470,1440) 473.06,1436.94 473.06,1426.94 502.06,1397.94 527.53,1397.94 U11.4 ; J1.SH3 1580.2,1472.5 1607.7,1500 v1(1650,1500) ; U10.GND 1606.24,676.24 1730.3,676.24 C17.2 ; J1.B1 1665.04,1186.16 1675.67,1175.53 J1.A12 J1.A11 ; R22.1 v1(1790,90) ; v1(1760,945) 1812.65,945 R1.2 ; J1.A1 1892.15,1175.87 1902.44,1186.16 J1.B12 ; J1.SH4 2010.99,1485 2115.55,1485 2116.1,1484.45 ; v1(2340,1445) 2357.15,1427.85 2357.15,1416.59 2371.24,1402.5 2466.24,1402.5 ; v1(2540,1460) 2558.02,1478.02 2558.02,1499.28 2562.15,1503.41 2576.97,1503.41 2581.1,1499.28 2581.1,1484.45 ; v2(2743.67,593.29) 2743.67,591.33 v2@2745,590 ; 2836.24,1402.5 2847.43,1391.31 2900.49,1391.31 ; C25.2 2877.87,1344.53 2892.57,1359.23 2892.57,1375.23 2900.49,1383.15 2900.49,1391.31 ; v1(2925,1440) 2925,1423.73 ; v1(2935.5,1220.21) 2960.62,1220.21 2999.61,1181.22 U4.1 ; 2946.24,1402.5 2925,1423.73 ; U4.8 3039.96,630.04 v1(3070,600) ; 3200.41,1440.28 3210.13,1450 v1(3265,1450) 3312.5,1402.5 3436.24,1402.5 3450.94,1417.2 3582.55,1417.2 v4(3602.36,1437.01) ; U4.10 3617.72,708.78 3681.94,773 3681.94,811.94 v1(3685,815) 3685,850.94 C14.2 ; C15.2 v1(3690,1110) ; 2900.49,1391.31 2912.75,1403.56 2912.75,1411.48 2925,1423.73
  Bottom Layer w8: MCU1.41_13 713.07,627.64 J3.P6 ; C19.2 904.06,995.94 v1(905,995) 956.87,995 C20.2 ; v1@1165,190 1165.24,190.24 LS1.3 ; LS1.4 1445,265.47 v1(1445,340) ; R30.2 1470.59,857.94 Q7.2 1492.88,752.8 1500.67,745 v1(1505,745) ; v1(1650,1500) 1650,1462.65 R2.2 ; R31.2 2054.23,1350 v1(2056.62,1352.39) ; v1(2085,590) 2164.68,590 U1.1 ; v1(2135,1115) 2138.06,1111.94 2138.06,1106.31 2169.21,1075.16 U2.1 ; C2.2 2290,415.94 C1.2 v1(2356,515) ; C5.2 2304.06,1000 v1(2335,1000) ; C6.2 2304.53,905 v1(2335,905) ; C4.2 C3.2 2328,690 2333.99,684.01 2352.94,684.01 v1(2356,680.95) ; C8.2 2295,1160.47 C7.2 2294.53,1152.13 2309.23,1137.43 2337.57,1137.43 v1(2340,1135) ; v1(2629,765) 2629,783.76 Q6.3 ; v1(2811.82,599) 2811.82,662.97 R18.1 ; R20.2 2817.35,923.78 R19.2@2882.62,858.5 ; R19.2 2899.56,875.41 2929.41,875.41 v1(2930,876) ; R5.2 3068.07,451.7 C9.2 3071.33,450 v1(3130,450) ; Q3.3 3278.28,780 v1(3391,780) ; Q2.3 3381.15,600.74 3398.5,583.39 v2(3398.5,575) ; v1(3410,980) 3413.06,976.94 3418.03,976.94 R15.2 ; v1(3450,605) 3450,653 R13.1 ; v1(3505,800) 3518.8,813.8 R14.2
  Bottom Layer w60: v2(2743.67,593.29) 2745,594.62 Q5.3
  other v1: 1165.12,190.12 170,370 2055,1485
  other v4: 137.8,137.8 3602.36,137.8 137.8,1437.01
GPS_UART_RX: MCU1.11 U9.6 | length 1097.9
  Top Layer w10: MCU1.11 840,438.9 v1(840,380)
  Bottom Layer w10: v1(840,380) 870.71,380 1020,529.29 1020,1175 U9.6
GPS_UART_TX: MCU1.10 U9.5 | length 1651.6
  Top Layer w10: v1(540,1335) 960,1335 U9.5 ; v1(780,380) 780,433.07 MCU1.10
  Bottom Layer w10: v1(540,1335) 540,560 720,380 v1(780,380)
MPU6050_INT: MCU1.17 U10.INT | length 907.7
  Top Layer w10: MCU1.17 1041.65,615 v1(1245,615) ; v1(1310,560) 1310,360 U10.INT
  Bottom Layer w10: v1(1245,615) 1297.32,562.68 1307.32,562.68 v1(1310,560)
NetD2_A: D2.A U5.2 | length 408.7
  Bottom Layer w10: U5.2 3136.15,1226.81 3331.46,1031.5 D2.A
NetD2_C: D2.C R15.1 | length 91.2
  Bottom Layer w10: R15.1 3518.8,1028.72 D2.C
NetD3_A: D3.A U7.2 | length 408.7
  Bottom Layer w10: U7.2 2500,1238.82 2695.31,1043.5 D3.A
NetD3_C: D3.C R20.1 | length 91.2
  Bottom Layer w10: R20.1 2882.65,1040.72 D3.C
NetD4_C: D4.C R31.1 | length 111.5
  Bottom Layer w8: R31.1 2039.66,1255 D4.C
NetD5_A: D5.A LS1.2 Q7.3 | length 313.6
  Bottom Layer w10: D5.A 1352.09,745 1407.95,689.13 1440.16,689.13 1445,684.29 Q7.3 1445,545 LS1.2
NetD6_A: D6.A R11.1 R13.2 U6.3 | length 558.6
  Bottom Layer w20: U6.3 3364.15,895 3550,895 3570,875 3570,802.7 R11.1@3534.74,767.44 ; R11.1 R13.2 3518.8,605.59 3530.85,593.54 3532.91,593.54 3544.57,581.89 D6.A ; R11.1 R11.1@3534.74,767.41
NetD6_C: D6.C R33.1 | length 89.9
  Bottom Layer w20: D6.C 3615.43,581.89 3659.09,625.55 3659.09,631.44 R33.1
NetD7_A: D7.A R16.1 R18.2 U8.3 | length 417.1
  Bottom Layer w10: U8.3 2720,901.28 2801.28,820 2826.13,820 R16.1@2882.62,763.5 ; R16.1 R18.2 2882.65,597.35 D7.A
NetD7_C: D7.C R35.1 | length 75.3
  Bottom Layer w10: D7.C 2965.87,591.89 2985,611.02 R35.1
NetJ1_A5: J1.A5 R1.1 | length 116.2
  Top Layer w8: J1.A5 1813.43,1014.22 R1.1
NetJ1_B5: J1.B5 R2.1 | length 195.8
  Bottom Layer w8: R2.1 1711.82,1335.49 1711.82,1267.67 J1.B5
NetJ2_1: J2.1 U4.9 | length 236.5
  Top Layer w6.8: J2.1 U4.9@3580,610.04
  Top Layer w10: U4.9@3580,614.37 3595.67,630.04 U4.9
NetLED1_2: LED1.2 LED2.4 | length 355.2
  Top Layer w10: LED1.2@2291.46,1522.99 2302.97,1522.99 2315.69,1510.28 2315.69,1498.76 2334.45,1480 2470,1480 2550.28,1399.72 2570.83,1399.72 LED2.4
NetLED1_4: LED1.4 R29.2 | length 134.4
  Top Layer w8: R29.2 LED1.4@2105,1397.01
NetLED2_2: LED2.2 LED3.4 | length 348.2
  Top Layer w10: LED2.2@2776.46,1510 2939.04,1510 3049.02,1400.02 3049.02,1399.72 3061.73,1387.01 LED3.4
NetQ1_1: Q1.1 Q3.1 R11.2 | length 284.7
  Bottom Layer w10: Q1.1 3360.43,813.9 Q3.1 3377.13,809.1 3395.86,809.1 R11.2
NetQ1_2: Q1.2 Q3.2 R12.1 | length 346.9
  Bottom Layer w10: R12.1 3138.78,739.1 Q1.2 3360.44,739.1 Q3.2
NetQ2_1: Q2.1 R12.2 | length 78.7
  Bottom Layer w10: R12.2 Q2.1
NetQ4_1: Q4.1 Q6.1 R16.2 | length 284.7
  Bottom Layer w10: Q4.1 2724.28,825.9 Q6.1 2740.98,821.11 2759.71,821.11 R16.2
NetQ4_2: Q4.2 Q6.2 R17.1 | length 361.1
  Bottom Layer w10: R17.1 2502.63,751.1 2574.23,751.1 2583.01,742.32 2583.01,740.86 2588.86,735 2704.25,735 2726.3,757.05 Q6.2
NetQ5_1: Q5.1 R17.2 | length 78.7
  Bottom Layer w10: R17.2 Q5.1
NetR9_2: R9.2 U9.2 | length 168.2
  Top Layer w10: R9.2 1305,1129.69 1305,1270 U9.2
NetR22_2: R22.2 U10.AD0 | length 151.1
  Top Layer w10: U10.AD0 1730.31,170 R22.2
NetR32_1: R32.1 U6.2 | length 178.1
  Bottom Layer w8: U6.2 3360,1236.15 v1(3360,1160) 3364.33,1160 3374.33,1150 R32.1@3452.35,1150
NetR34_1: R34.1 U8.2 | length 153
  Bottom Layer w8: U8.2 2727.01,1245 v1(2785,1245) 2785,1177.35 R34.1
PYRO_CH1_CONT: MCU1.39 R19.1 U7.3 | length 3129.2
  Top Layer w10: MCU1.39 390,1127.87 v1(390,1070)
  Power Pour w10: v1(390,1070) 494.73,1174.73 494.73,1221.95 686.77,1414 1206.74,1414 1313.74,1521 1983.7,1521 2457.7,1047 2457.7,1022.3 v1(2460,1020)
  Bottom Layer w10: v1(2460,1020) 2500,980 ; U7.3 2500,980 ; R19.1 2817.35,897.65 2675,1040 2560,1040 2500,980
PYRO_CH1_GATE: MCU1.4 U8.1 | length 3553
  Top Layer w15: v1(375,570) 477.7,467.3 477.7,451.2 MCU1.4
  Bottom Layer w15: v1(375,570) 290.75,654.25 290.75,1395.75 445,1550 2322.01,1550 U8.1
PYRO_CH2_CONT: MCU1.38 R14.1 U5.3 | length 3920
  Top Layer w10: MCU1.38 437.91,1072.09 v1(440,1070)
  Power Pour w10: v1(440,1070) 405,1035 375,1035 360,1050 360,1237.2 571.8,1449 904.3,1449 1000.3,1545 2395,1545 2945,995 v1(3135,995)
  Bottom Layer w10: v1(3135,995) 3136.15,993.85 3136.15,889.81 3179.46,846.5 R14.1
PYRO_CH2_GATE: MCU1.5 U6.1 | length 4259.4
  Top Layer w15: v1(420,595) 535.35,479.65 535.35,443.55 MCU1.5
  Bottom Layer w15: v1(420,595) 420,598.79 360,658.79 360,1270 522.35,1432.35 877.05,1432.35 969.7,1525 2310.46,1525 2560,1275.46 2560,1220 2665,1115 2889.18,1115 2975,1200.82 2975,1275 3005,1305 3197.23,1305 3256.15,1246.08 U6.1
RESET: C10.1 MCU1.3 R7.2 S1.1 S1.2 | length 787.7
  Top Layer w10: S1.2 S1.1 251.69,178.31 296.77,133.23 306.3,133.23 C10.1 323.6,123.13 R7.2 437.91,141.07 MCU1.3
RFM95W_CS: MCU1.18 U4.5 | length 2065.4
  Top Layer w10: MCU1.18 1049.84,673.19 1063.19,673.19 1194.47,804.47 1338.67,804.47 1384.79,850.59 3001.65,850.59 U4.5
RFM95W_INT: MCU1.7 U4.14 | length 3389.9
  Top Layer w10: MCU1.7 650.63,428.27 650.63,409.81 755.44,305 1014.24,305 1529.24,820 2225,820 2300,745 2301,744 3054.07,744 3333.81,1023.74 U4.14
RFM95W_RESET: MCU1.12 U4.6 | length 2448.3
  Top Layer w10: MCU1.12 887.91,367.09 927,328 1013,328 1519,834 2416,834 2422.93,827.07 2445,805 2785,805 2802.48,787.52 U4.6
SD_CS: J3.P2 MCU1.35 | length 586.1
  Top Layer w10: v1(585,1185) 585,1132.87 MCU1.35
  Bottom Layer w10: v1(585,1185) 585,865 635,815 736.46,815 750.59,800.87 J3.P2
SD_DETECT: J3.WP MCU1.34 R28.2 | length 537.5
  Top Layer w10: MCU1.34 640,1132.05 v1(640,1185)
  Bottom Layer w10: v1(640,1185) 660,1185 720,1125 720,922.45 743.78,898.67 743.78,894.29 750.59,887.48 J3.WP@767.52,887.48 ; J3.WP 786.02,887.48 823.54,925 R28.2
SNS_I2C_SCL: MCU1.31 R10.2 U10.SCL U11.5 | length 2187.6
  Top Layer w10: U11.5 532.99,1455.47 595.53,1392.94 770.25,1392.94 R10.2 ; MCU1.31 790,1132.05 v1(790,1195) ; v1(805,1370) 805,1373.79 810,1378.79 810,1432.65 R10.2
  Bottom Layer w10: v1(790,1195) 790,1195.18 765,1220.18 765,1330 v1(805,1370) 1415,1370 1586.95,1198.05 1586.95,1033.05 1646.5,973.5 1646.5,616.5 U10.SCL
SNS_I2C_SDA: MCU1.23 R21.2 U10.SDA U11.6 | length 2222.3
  Top Layer w10: U11.6 543.74,1512.41 543.74,1510.44 559.37,1510.44 564.82,1505 R21.2 ; R21.2 857.35,1550 1010,1550 1159,1401 1159,1020.54 ; MCU1.23 1048.94,910.47 1159,1020.54 ; v1(1535,1025) 1163.46,1025 1159,1020.54
  Bottom Layer w10: v1(1535,1025) 1535,535 U10.SDA
SNS_SPI_MISO: J3.P7 MCU1.21 R24.2 U4.2 | length 2567
  Top Layer w10: v1(825,625) 827.68,627.68 827.68,667.68 970.47,810.47 MCU1.21 1049.84,823.19 1063.19,823.19 1086.47,846.47 1321.27,846.47 1452.08,977.29 2067.29,977.29 2192.48,1102.48 2496.82,1102.48 2501.3,1098 2518.7,1098 2523.18,1102.48 U4.2
  Bottom Layer w10: J3.P7 861.68,584.33 R24.2 ; v1(825,625) 825,622.32 R24.2
SNS_SPI_MOSI: J3.P3 MCU1.19 R27.2 U4.3 | length 2552.6
  Top Layer w10: v1(975,710) 1036.65,710 MCU1.19 1048.94,710.47 1156.94,818.47 1332.87,818.47 1379.4,865 2860,865 2900,905 3055,905 3080,930 3080,978.78 3035.04,1023.74 U4.3
  Bottom Layer w8: J3.P3 859.79,757.56 R27.2 ; R27.2@862.38,755 907.38,710 v1(975,710)
SNS_SPI_SCK: J3.P5 MCU1.20 R25.2 U4.4 | length 2443.3
  Top Layer w10: v1(895,625.59) 895,687.62 967.85,760.47 MCU1.20 1048.94,760.47 1120.94,832.47 1327.07,832.47 1374.6,880 2675,880 2740,945 U4.4
  Bottom Layer w10: J3.P5 861.4,670.94 R25.2 ; R25.2@862.38,670 892.32,640.06 892.32,628.27 v1(895,625.59)
USB2_N: MCU1.13 R4.1 | length 1770.3
  Top Layer w15: MCU1.13 927.7,430.77 927.7,387.84 954.62,360.91 979.82,360.91 987.36,368.46 v1(989.8,368.46)
  Power Pour w15: v1(989.8,368.46) 989.8,370.9 994.3,375.4 994.3,378.64 1023.5,407.84 1023.5,565.09 965.06,623.53 965.06,677.71 973.84,686.5 984.73,686.5 998.5,700.27 998.5,747.76 1349.01,1098.27 1427.48,1098.27 1797.41,1468.19 1797.41,1491.08 1806.19,1499.87 1824.87,1499.87 v1(1825,1500)
  Bottom Layer w15: R4.1 v1(1825,1500)
USB2_P: MCU1.14 R3.1 | length 1671.8
  Top Layer w15: v1(964.8,390.18) 964.8,390.57 977.7,403.46 977.7,430.77 MCU1.14
  Power Pour w15: v1(964.8,390.18) 967.23,390.18 971.73,394.68 974.98,394.68 998.5,418.2 998.5,554.73 940.06,613.18 940.06,688.07 951.5,699.51 951.5,736.11 1338.66,1123.27 1417.13,1123.27 1772.41,1478.55 1772.41,1490.97 1763.62,1499.76 v1@1744.83,1499.76
  Bottom Layer w15: v1(1744.81,1499.74) 1745,1499.56 R3.1
VBAT: C1.1 C2.1 P1.1 P1.3 P1.5 Q1.3 Q4.3 R6.2 U1.3 U6.4 U8.4 | length 3658.9
  Power Pour w60: P1.1 2310,700 v2(2395,785) ; v2(2620,1000) 2610,1000 v2(2395,785) ; P1.3 2710,470 v2(2395,785) ; v2(3080,830) 3080,850 v2(3230,1000) ; P1.5 3200,314.45 3200,960
  Bottom Layer w30: v2(2395,785) 2397.44,785 2399.72,787.28 2463.78,787.28 Q4.3 ; U8.4 v2(2620,1000) ; v2(3080,830) 3101.15,808.85 Q1.3 ; v2(3230,1000) 3256.15,973.85 U6.4
  Bottom Layer w40: U1.3 2225,410 C2.1 ; C1.1 2230.47,514.53 2230.47,415.47 C2.1 ; P1.1 2230,304.45 C2.1 ; P1.5@3096.37,224.45 P1.5
  Bottom Layer w60: R6.2 P1.5@3096.37,224.45
VBAT_MON: C9.1 MCU1.15 R5.1 R6.1 | length 2702.1
  Top Layer w10: MCU1.15 1037.6,510 v1(1095,510)
  Bottom Layer w10: v1(1095,510) 1095,160 1237.5,17.5 1578.25,17.5 1637.5,17.5 1889.73,269.73 1889.73,304.73 2140,555 2485,555 2515,525 2861.16,525 2869.16,517 R5.1 2974.32,511.53 C9.1
VBUS: D1.2 J1.A4 J1.A9 J1.B4 J1.B9 | length 645
  Top Layer w6: v1(1730,1055) 1733.44,1058.44 1733.44,1066.1 1734.86,1067.51 1734.86,1128.09 J1.A9 1734.13,1128.81 1734.13,1193 J1.B4 ; J1.A4 1833.11,1101.66 1840.73,1094.04 1840.73,1093.98 1844.97,1089.73 2016.65,1089.73 D1.2 ; J1.A4@1833.27,1100.87 1833.27,1091.03 1852.56,1071.75 1852.56,1061.63 v1(1856,1058.18) ; J1.A4@1833.52,1128.65 1833.52,1193.16 J1.B9
  Bottom Layer w6: v1(1730,1055) 1745,1040 1837.82,1040 v1(1856,1058.18)
VCC_3V3: C7.1 C8.1 C11.1 C12.1 C14.1 C15.1 C17.1 C18.1 C19.1 C20.1 C21.1 C22.1 C23.1 C24.1 C25.1 C26.1 D4.A J3.CD J3.P4 LED1.1 LED2.1 LED3.1 MCU1.2 R7.1 R8.1 R9.1 R10.1 R21.1 R23.1 R24.1 R25.1 R26.1 R27.1 U2.2 U4.13 U5.4 U7.4 U9.3 U9.8 U10.VCC U11.2 U11.3 | length 3285.4
  Top Layer w8: C18.1 406.89,1459.53 U11.2 U11.3 409.53,1395 v1(365,1395) ; R8.1 365,1293.13 v1(365,1330) ; MCU1.2 399.53,429.37 C11.1 C12.1 399.53,169.74 v1(399.2,169.42) ; R7.1 422.18,60 v1(470,60) ; R10.1 v1(920,1435) 919.12,1435.88 919.12,1505.88 v1(918.23,1506.77) 879.42,1506.77 R21.1 ; U10.VCC 1605.3,764.7 1730.3,764.7 C17.1 ; LED1.1@2291.46,1397.01 2293.02,1395.44 2293.02,1371.98 v1(2320,1345) 2323.06,1341.94 2323.06,1330.63 2368.22,1285.47 C24.1 C21.1 ; LED2.1@2762.74,1400.72 LED2.1 ; LED2.1@2762.83,1375.46 2771.89,1375.46 2774.06,1373.29 2774.06,1342.69 2785,1331.75 v1(2785,1330) ; C25.1 2877.87,1285.47 2909.23,1254.12 v1(2910.88,1254.12) ; v1@2910.06,1253.29 2911.12,1252.23 2938.88,1252.23 2972.13,1285.47 C26.1 ; LED3.1 3266.46,1316.26 v1(3285.71,1297.01) 3290.04,1297.01 3302.05,1285 3364.53,1285 C22.1 C23.1 3536.53,1285.47 3552,1270 v1(3555,1270)
  Top Layer w10: U9.3 1215,1135 R9.1 ; U4.13 3607.93,952.93 v1@3682.16,952.93 ; C14.1 3688.14,916.86 v1(3688.14,952.02) 3688.14,983.14 C15.1
  Bottom Layer w8: J3.P4 768.68,714.63 819.63,714.63 v1(820,715) ; J3.CD 775,943.39 v1(775,994) 775,998.33 789.3,1012.63 789.3,1019.3 810.3,1040.3 842.65,1040.3 C19.1 857.82,1054.53 C20.1 ; R24.1 R25.1 R25.1@935,677.35 ; R26.1 972.68,545 v1(975,545) 971.94,548.06 964.62,548.06 R24.1 ; R27.1@935,747.65 R27.1 R23.1 928.47,840.82 928.47,868.22 975,914.75 v1(975,950) ; U7.4 v1(2400,985) ; v1(2950,820) 2953.15,820 U5.4
  Bottom Layer w10: v1(2125,985) U2.2 ; C7.1 2223.1,1172.37 2207.63,1172.37 v1(2190,1190) 2190,1193.79 2180,1203.79 D4.A C8.1
VCC_5V: C3.1 C4.1 C5.1 C6.1 D1.1 D5.C LS1.1 U1.2 U2.3 | length 2392.2
  Top Layer w15: D1.1 2052.92,940 v1(2175,940)
  Power Pour w15: v2(1245,420) 2070,420 v3(2105,455) 2110,455 2166.05,511.05 v1(2166.05,689.31)
  Bottom Layer w15: v1(2166.05,689.31) 2235.26,689.31 C3.1 C4.1 2235.71,785.24 2235.71,894.76 2235.63,894.84 U2.3 2175,896.54 v1(2175,940) ; C5.1 2235.24,989.76 C6.1@2235.24,895.24
  Bottom Layer w30: LS1.1@1163.86,546.14 D5.C ; LS1.1@1163.86,547.52 1165.24,546.14 LS1.1 ; D5.C@1163.98,744.37 1163.98,546.02 LS1.1 ; v2(1245,420) 1243.28,421.72 1243.28,466.72 LS1.1 ; v3(2105,455) 2106.72,456.72 2114.08,456.72 2154.21,496.85 2161.69,496.85 U1.2
WS2812B_DATA: MCU1.6 R29.1 | length 2168.3
  Top Layer w10: MCU1.6 587.91,429.17 746.92,270.17 1075.17,270.17 v1(1160,355) ; v1(2090,1140) 2090,1182.35 R29.1
  Bottom Layer w10: v1(1160,355) 1372.9,355 1377.02,355 1380.27,358.25 1439.99,423.5 1671.05,423.5 1673.97,426.43 1674.14,426.6 1674.3,426.77 2090,883.39 2090,887.26 v1(2090,1140)
pads on no net: J1. J1.A2 J1.A3 J1.A8 J1.A10 J1.B2 J1.B3 J1.B8 J1.B10 J3. J3.G1 J3.G2 LED3.2 MCU1.8 MCU1.9 MCU1.16 MCU1.24 MCU1.25 MCU1.26 MCU1.29 MCU1.30 MCU1.32 MCU1.33 MCU1.36 MCU1.37 U1.4 U2.4 U4.7 U4.11 U4.12 U4.15 U4.16 U9.1 U9.9 U9.SH1 U9.SH2 U10. U10.XCL U10.XDA U11.1

## Polygon pours and split planes (outlines as drawn)
GND on Top Layer "GND_L01_P007" (solid, pour order 7): 0,118 0,1456.8 cw(c118,1456.8) 118,1574.8 3622.16,1574.8 cw(c3622.16,1456.8) 3740.16,1456.8 3740.16,118 cw(c3622.16,118) 3622.16,0 118,0 cw(c118,118)
GND on Top Layer "NONET_L01_P-001" (solid, pour order 1): 730,635 730,815 545,815 545,635
GND on Bottom Layer "GND_L04_P008" (solid, pour order 8): 0,118 0,1456.8 cw(c118,1456.8) 118,1574.8 3622.16,1574.8 cw(c3622.16,1456.8) 3740.16,1456.8 3740.16,118 cw(c3622.16,118) 3622.16,0 118,0 cw(c118,118)
VBAT on Bottom Layer "NONET_L01_P-001" (solid, pour order 0): 2190,325 2190,15 3200,15 3200,325
VCC_3V3 on Power Pour "VCC_3V3_L03_P010" (solid, pour order 10): 0,118 0,1456.8 cw(c118,1456.8) 118,1574.8 3622.16,1574.8 cw(c3622.16,1456.8) 3740.16,1456.8 3740.16,118 cw(c3622.16,118) 3622.16,0 118,0 cw(c118,118)
GND on GND Pour "GND_L02_P011" (solid, pour order 11): 0,118 0,1456.8 cw(c118,1456.8) 118,1574.8 3622.16,1574.8 cw(c3622.16,1456.8) 3740.16,1456.8 3740.16,118 cw(c3622.16,118) 3622.16,0 118,0 cw(c118,118)

## Silkscreen, mask and mechanical layers (free items; w line width, h text height)
Top Overlay:
  drawing of 67 lines, arcs and shapes, not listed
  text "BOOT" at 40,1205 h30 r90
  text "If you can see this, you have a problem" at 3125,705 h30
  text "IGNIS v2.2" at 2462.5,560.36 h60
  text "Put that back!" at 412,508 h45 r90
  text "Here be dragons" at 2770,290 h30
  text "RESET" at 40,265 h30 r90
  text "[VBAT+   VBAT-]" at 2237.5,0 h20
  text "[CH1+     CH1-]" at 2647.5,0 h20
  text "[CH2+     CH2-]" at 3047.5,0 h20
Bottom Overlay:
  drawing of 23 lines, arcs and shapes, not listed
  text "E. Guadarrama      J. A. Prieto" at 1453.75,1376.17 h70.87
  text "Beep boop" at 1375,295 h30

## Text inside footprints (layer, text, board x,y; h text height)
MCU1: Top 3D Body "ANTENNA" at 170.98,608.31 h50 r90